# Altium PCB VCO_CtrlBoard.PcbDoc
Units mm, origin at the board's own origin, x right, y up, seen from the top; angles counter-clockwise.
Board outline 45 x 100 mm, 2 copper layers (Top Layer, Bottom Layer); 19 components, 20 nets, 98 pads, 18 vias.
Unrouted connection lines stored in the file: 32.
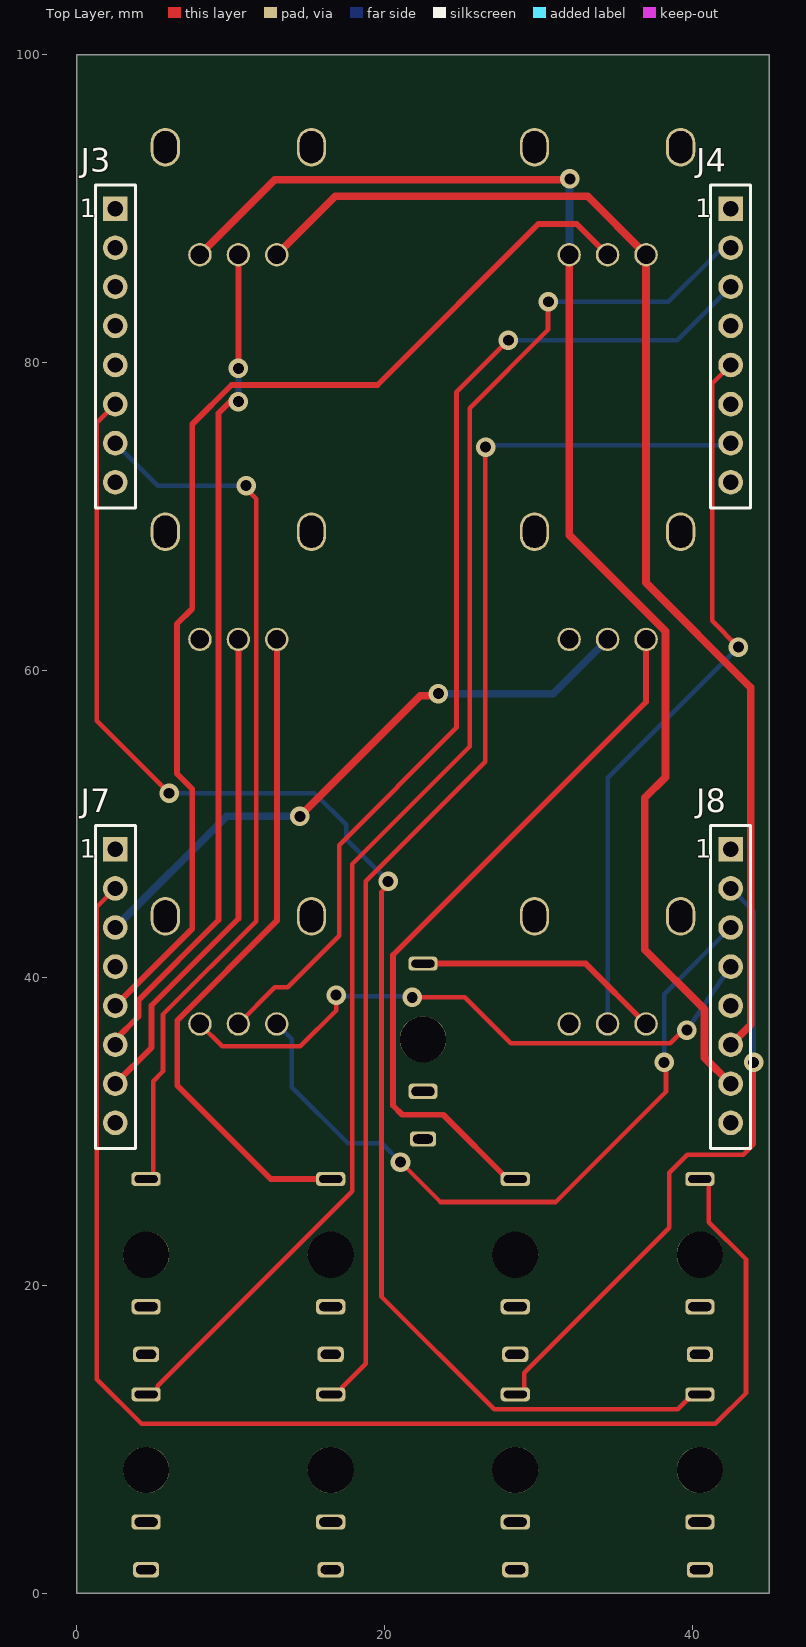
[diagram p0: Top Layer view]
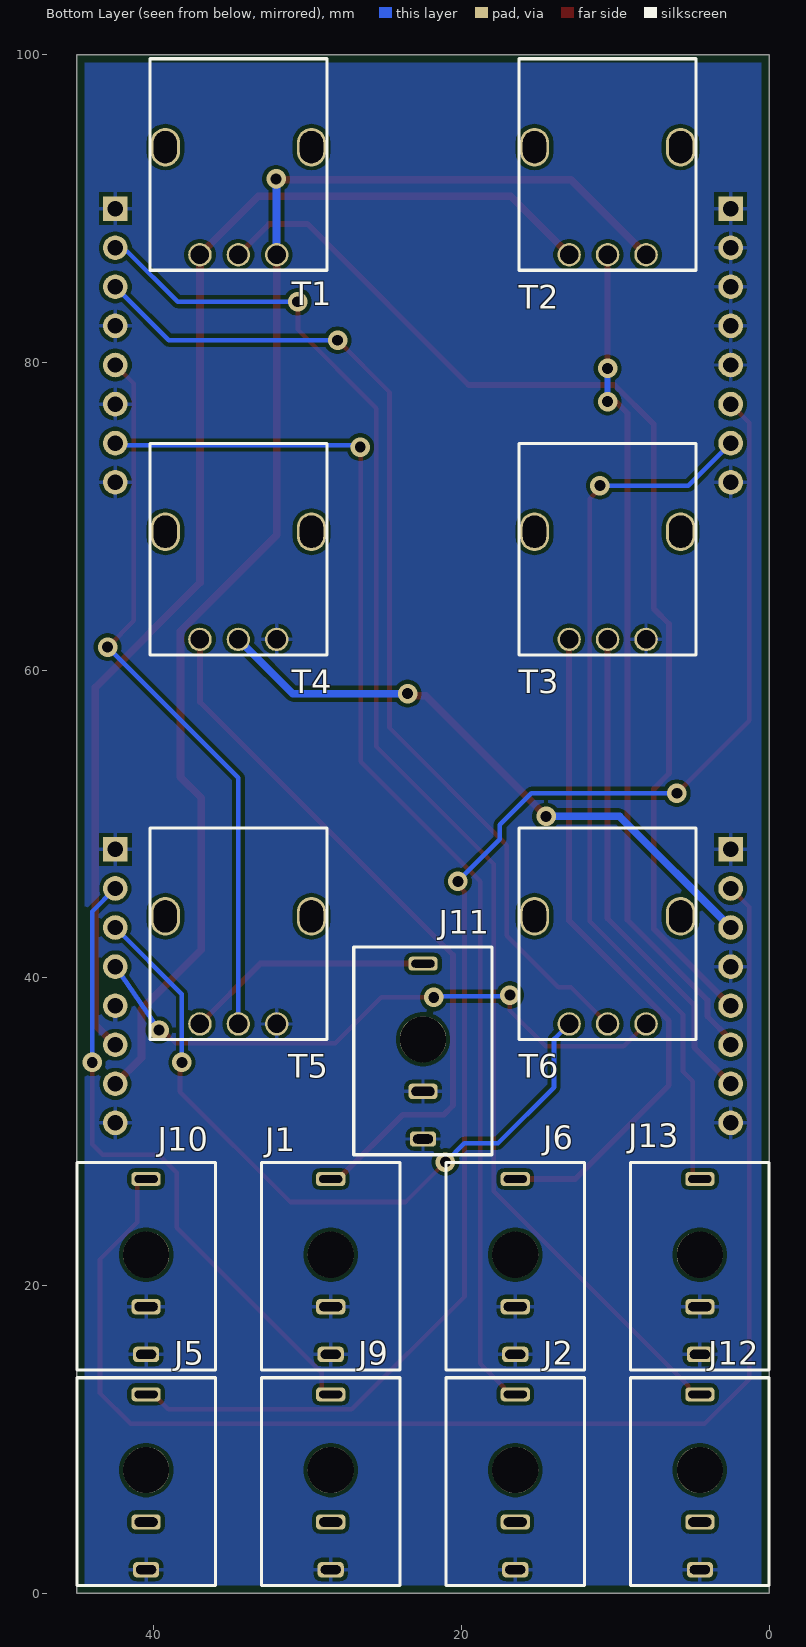
[diagram p1: Bottom Layer view, seen from below]

## Layer stack, top to bottom
Top Solder: solder mask 0.0102, Solder Resist, Dk 3.5
Top Layer: signal copper 0.0356
Dielectric 1: dielectric 0.32, FR-4, Dk 4.8
Bottom Layer: signal copper 0.0356
Bottom Solder: solder mask 0.0102, Solder Resist, Dk 3.5

## Board outline
0,0 45,0 45,100 0,100

## Design rules (kind name [scope] priority, off if disabled: settings)
Clearance [All] p1: gap=0.254 ignorepadtopadclearanceinfootprint=FALSE except(0: Arc-Hole Track-Hole SMDPad-Hole THPad-Hole Via-Hole Fill-Hole Poly-Hole Region-Hole Text-Hole)
Height [All] p1: minheight=0 maxheight=100 prefheight=12.7
HoleSize [All] p1: absolutevalues=TRUE maxlimit=3 minlimit=0.025 maxpercent=80.000 minpercent=20.000
PolygonConnect [All] p1: connectstyle=Relief reliefconductorwidth=0.254 reliefentries=4 polygonreliefangle="90 Angle" airgapwidth=0.254
RoutingVias [All] p1: holewidth=0.711 width=1.27 viastyle="Through Hole" minholewidth=0.711 minwidth=1.27 maxholewidth=0.711 maxwidth=1.27
SolderMaskExpansion [All] p1: expansion=0.102 istentingtop=FALSE
Width Power [InNet('+12V') or InNet('-12V')] p1: maxlimit=1 minlimit=0.5 preferedwidth=0.5 minimp=50.000000 maximp=50.000000 favimp=50.000000
Width [All] p2: maxlimit=0.5 minlimit=0.3 preferedwidth=0.3 minimp=50.000000 maximp=50.000000 favimp=50.000000
28 further rules are at their usual default settings.

## Components (designator, comment, footprint, x,y, rotation, side; value= is the part's Value field where it differs from the comment)
J1 "PJ301-CM" PJ301-M-12 28.5,22 r180 bottom
J2 "PJ301-CM" PJ301-M-12 16.5,8 r180 bottom
J3 "HDR F 1x8 2.54MM" "HDR F 1x8 2.54MM" 2.5,83.65 r0 top
J4 "HDR F 1x8 2.54MM" "HDR F 1x8 2.54MM" 42.5,83.65 r0 top
J5 "PJ301-CM" PJ301-M-12 40.5,8 r180 bottom
J6 "PJ301-CM" PJ301-M-12 16.5,22 r180 bottom
J7 "HDR F 1x8 2.54MM" "HDR F 1x8 2.54MM" 2.5,42 r0 top
J8 "HDR F 1x8 2.54MM" "HDR F 1x8 2.54MM" 42.5,42 r0 top
J9 "PJ301-CM" PJ301-M-12 28.5,8 r180 bottom
J10 "PJ301-CM" PJ301-M-12 40.5,22 r180 bottom
J11 "PJ301-CM" PJ301-M-12 22.5,36 r180 bottom
J12 "PJ301-CM" PJ301-M-12 4.5,8 r180 bottom
J13 "PJ301-CM" PJ301-M-12 4.5,22 r180 bottom
T1 "RV0932" RV0932 34.5,94 r180 bottom value=20k
T2 "RV0932" RV0932 10.5,94 r180 bottom value=20k
T3 "RV0932" RV0932 10.5,69 r180 bottom value=20k
T4 "RV0932" RV0932 34.5,69 r180 bottom value=20k
T5 "RV0932" RV0932 34.5,44 r180 bottom value=20k
T6 "RV0932" RV0932 10.5,44 r180 bottom value=20k

## Footprints (in the part's own frame and the unit in brackets; to place one, negate y for a bottom-side part, rotate by r counter-clockwise, add the part's x,y. Pads: shape width x height; smd on the part's side, far side on the other; paste and mask are expansions set on the pad)
"HDR F 1x8 2.54MM" [mm]
  rect 1.6x1.6 hole 1: 1(0,6.35)
  round 1.6 hole 1: 2(0,3.81) 3(0,1.27) 4(0,-1.27) 5(0,-3.81) 6(0,-6.35) 7(0,-8.89) 8(0,-11.43)
  silkscreen extent -1.3,-13.1 1.3,7.9, body extent -1.27,-12.97 1.27,7.87, height 8.51
PJ301-M-12 [mm]
  rrect50% 1.7x1 hole 0.6 slot 1.3 at 0 deg: 1(0,-6.48)
  rrect50% 1.9x1 hole 0.6 slot 1.5 at 0 deg: 2(0,-3.38)
  rrect50% 1.9x0.9 hole 0.5 slot 1.5 at 0 deg: 3(0,4.92)
  round 3 hole 3 unplated: ""(0,0)
  silkscreen extent -4.5,-7.5 4.5,6, body extent -4.5,-6.68 4.5,5.95, height 14.5
RV0932 [mm]
  round 1.524 hole 1.2: 1(-2.5,-7) 2(0,-7) 3(2.5,-7)
  oval 1.9x2.5 hole 2.1 slot 1.5 at 0 deg: ""(-4.75,0) ""(4.75,0)
  silkscreen extent -5.75,-8 5.75,5.75, body extent -7.3,-7.3 7.3,7.3, height 27.4

## Part data
J1 J2 J5 J6 J9 J10 J11 J12 J13: library part PJ301-M-12
T1 T2 T3 T4 T5 T6: library part Potentiometer, SET=0.5

## Via types
v1: diameter 1.27, hole 0.711, Top Layer to Bottom Layer, 18 vias

## Nets (pads, with @x,y where several pads share a name; then routed paths per layer and width w, separated by ;. In a path a pad name is that pad's centre, name@x,y a point inside that pad or via, vN(x,y) a via of type N, cw(c..) or ccw(c..) an arc to the next point about the centre after c; other vN are vias at no path point)
+12V: J8.6 T1.1 T2.1 | length 81.9
  Top Layer w0.5: T2.1 16.8,90.8 33.2,90.8 T1.1 37,65.675 43.804,58.871 43.804,36.954 J8.6
-12V: J8.7 T1.3 T2.3 | length 90.4
  Top Layer w0.5: T2.3 12.875,91.875 31.986,91.875 v1(32.05,91.939) ; T1.3 32,68.79 38.266,62.524 38.266,53.046 36.925,51.705 36.925,41.825 40.8,37.95 40.8,34.81 J8.7
  Bottom Layer w0.5: T1.3 32.025,87.025 32.025,91.914 v1(32.05,91.939)
CoarseTune: J7.5 T1.2 | length 73.9
  Top Layer w0.381: J7.5 7.5,43.19 7.5,52.28 6.5,53.28 6.5,63 7.5,64 7.5,75.992 10.053,78.544 12.044,78.544 19.545,78.545 30,89 32.5,89 T1.2
CV: J7.2 J10.3 | length 92
  Top Layer w0.3: J7.2 1.296,44.606 1.296,13.904 4.2,11 41.5,11 43.5,13 43.5,21.693 41.075,24.118 41.075,26.626 40.781,26.92 J10.3
ExpFM: J7.3 T4.2 | length 39.8
  Top Layer w0.5: v1(14.5,50.5) 22.328,58.328 23.353,58.328 v1(23.5,58.475)
  Bottom Layer w0.5: J7.3 9.73,50.5 v1(14.5,50.5) ; v1(23.5,58.475) 30.975,58.475 T4.2
FineTune: J7.6 T2.2 | length 55
  Top Layer w0.381: J7.6 2.5,35.98 4,37.48 4,38.55 9.206,43.757 9.206,76.706 10,77.5 10.465,77.5 v1(10.5,77.465) ; v1(10.5,79.624) T2.2
  Bottom Layer w0.381: v1(10.5,77.465) v1(10.5,79.624)
Gnd: J1.1 J1.2 J2.1 J3.1 J3.2 J3.3 J3.4 J3.5 J3.8 J4.1 J4.4 J4.6 J4.8 J5.1 J6.1 J6.2 J7.1 J7.4 J7.8 J8.1 J8.5 J8.8 J9.1 J10.1 J10.2 J11.1 J11.2 J12.1 J13.1 J13.2 T3.3 T4.3 T5.3
LinFM: J7.7 T3.2 | length 32.2
  Top Layer w0.381: J7.7 4.85,35.46 4.85,38.2 10.5,43.85 T3.2
NetJ1_3: J1.3 T4.1 | length 47
  Top Layer w0.381: J1.3 28,26.92 23.82,31.1 21.15,31.1 20.556,31.694 20.556,41.481 37,57.925 T4.1
NetJ6_3: J6.3 T3.1 | length 44.2
  Top Layer w0.381: T3.1 13,43.706 6.525,37.231 6.525,33 12.605,26.92 J6.3
NetJ11_3: J11.3 T5.1 | length 16.1
  Top Layer w0.381: J11.3 33.08,40.92 T5.1
PulseOut: J4.2 J12.3 | length 95.4
  Top Layer w0.3: J12.3 4.956,12.92 5.25,13.214 5.25,13.475 17.9,26.125 17.9,47.4 25.539,55.039 25.539,77.039 30.626,82.126 30.626,83.926 v1(30.65,83.95)
  Bottom Layer w0.3: v1(30.65,83.95) 38.45,83.95 41.711,87.211 42.251,87.211 J4.2
PulseWidth: J4.3 T6.2 | length 68.1
  Top Layer w0.3: T6.2 12.875,39.375 13.7,39.375 17.05,42.725 17.05,48.625 24.675,56.25 24.675,78.075 v1(28.05,81.45)
  Bottom Layer w0.3: v1(28.05,81.45) 39.03,81.45 J4.3
PulseWidthN: J8.4 T6.3 | length 40.9
  Top Layer w0.3: T6.3 9.45,35.55 14.525,35.55 16.85,37.875 v1(16.85,38.875) ; v1(21.8,38.725) 25.225,38.725 28.212,35.738 38.561,35.738 39.424,36.6 v1(39.661,36.6)
  Bottom Layer w0.3: v1(16.85,38.875) 16.925,38.8 21.725,38.8 v1(21.8,38.725) ; v1(39.661,36.6) J8.4
PulseWidthP: J8.3 T6.1 | length 47.4
  Top Layer w0.3: v1(21.039,28.025) 23.639,25.425 31.125,25.425 38.3,32.6 38.3,34.375 v1(38.175,34.5)
  Bottom Layer w0.3: T6.1 13.98,36.02 13.98,32.895 17.625,29.25 19.814,29.25 v1(21.039,28.025) ; v1(38.175,34.5) 38.175,38.945 J8.3
PWM: J4.5 T5.2 | length 47.6
  Top Layer w0.3: J4.5 41.296,78.636 41.296,63.204 v1(43,61.5)
  Bottom Layer w0.3: T5.2 34.5,53 v1(43,61.5)
SawOut: J3.6 J5.3 | length 96.2
  Top Layer w0.3: J3.6 1.296,76.096 1.296,56.704 v1(6,52) ; v1(20.235,46.265) 20.235,46.039 19.8,45.605 19.8,19.275 27.125,11.95 39.071,11.95 40.041,12.92 J5.3
  Bottom Layer w0.3: v1(6,52) 15.45,52 17.5,49.95 17.5,49 v1(20.235,46.265)
SineOut: J2.3 J4.7 | length 82.1
  Top Layer w0.3: J2.3 16.959,12.92 17.254,13.214 17.254,13.393 18.775,14.914 18.775,46.275 26.539,54.039 26.539,74.461 v1(26.578,74.5)
  Bottom Layer w0.3: v1(26.578,74.5) 26.708,74.63 42.37,74.63 J4.7
Sync: J3.7 J13.3 | length 58.1
  Top Layer w0.3: J13.3 4.665,26.92 4.959,27.214 4.959,33.284 5.6,33.925 5.6,37.625 11.666,43.691 11.666,71.132 11,71.798 v1(11,72)
  Bottom Layer w0.3: J3.7 5.26,72 v1(11,72)
TriangleOut: J8.2 J9.3 | length 42.2
  Top Layer w0.3: J9.3 28.781,12.92 29.075,13.214 29.075,14.32 38.5,23.745 38.5,27.324 39.676,28.5 43.324,28.5 44,29.176 v1(44,34.5)
  Bottom Layer w0.3: J8.2 44,44.31 v1(44,34.5)
pads on no net: J1. J2. J2.2 J5. J5.2 J6. J9. J9.2 J10. J11. J12. J12.2 J13. T1. T2. T3. T4. T5. T6.

## Polygon pours and split planes (outlines as drawn)
Gnd on Bottom Layer "GND_L02_P000" (solid, pour order 0): 44.5,99.5 0.5,99.5 0.5,0.5 44.5,0.5

## Text inside footprints (layer, text, board x,y; h text height)
J3: Top Overlay "1" at 0.2,89.45 h1.2
J4: Top Overlay "1" at 40.2,89.45 h1.2
J7: Top Overlay "1" at 0.2,47.8 h1.2
J8: Top Overlay "1" at 40.2,47.8 h1.2